# Altium PCB pwr_pcb.PcbDoc
Units mm, origin at the board's own origin, x right, y up, seen from the top; angles counter-clockwise.
Board outline 75 x 100 mm, 4 copper layers (Top Layer, Int1 (GND), Int2 (PWR), Bottom Layer), stack 1.203 mm thick; 49 components, 55 nets, 175 pads, 0 vias.
Unrouted connection lines stored in the file: 117.
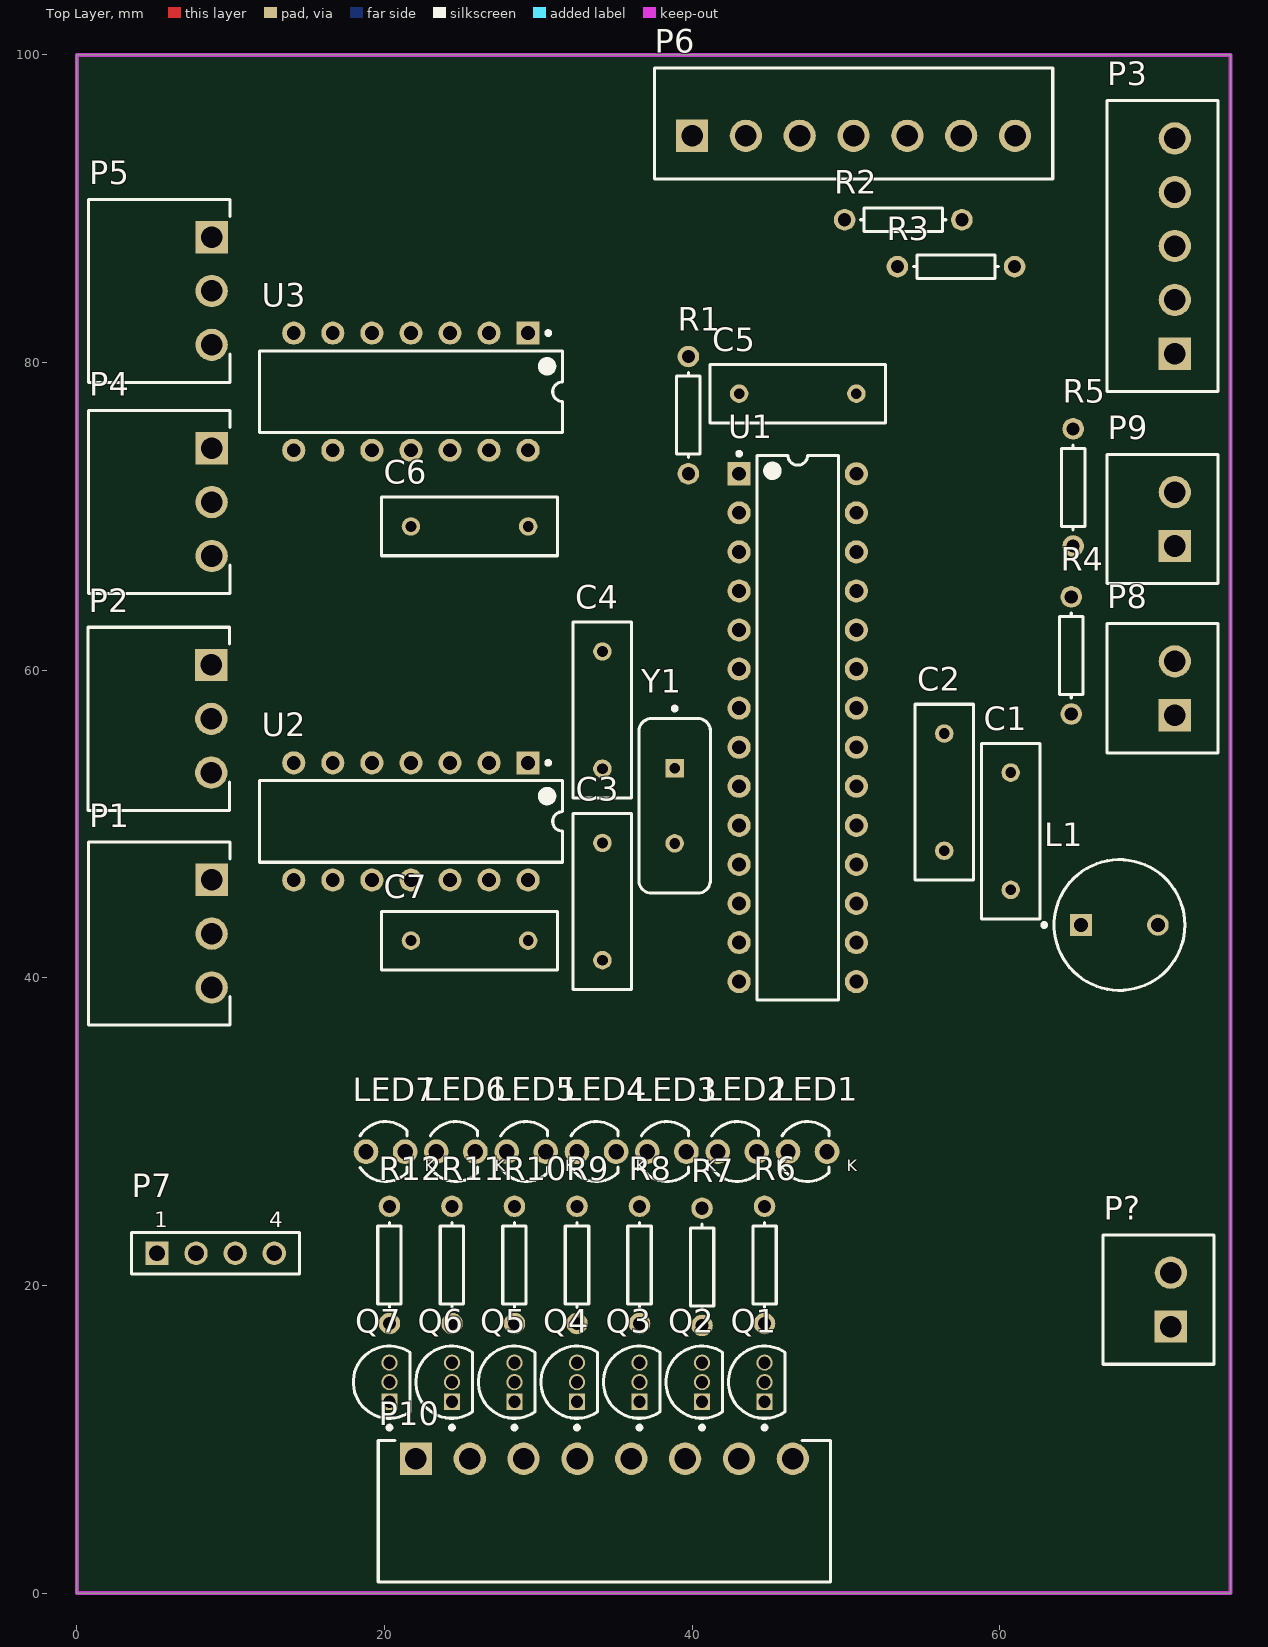
[diagram p0: Top Layer view]
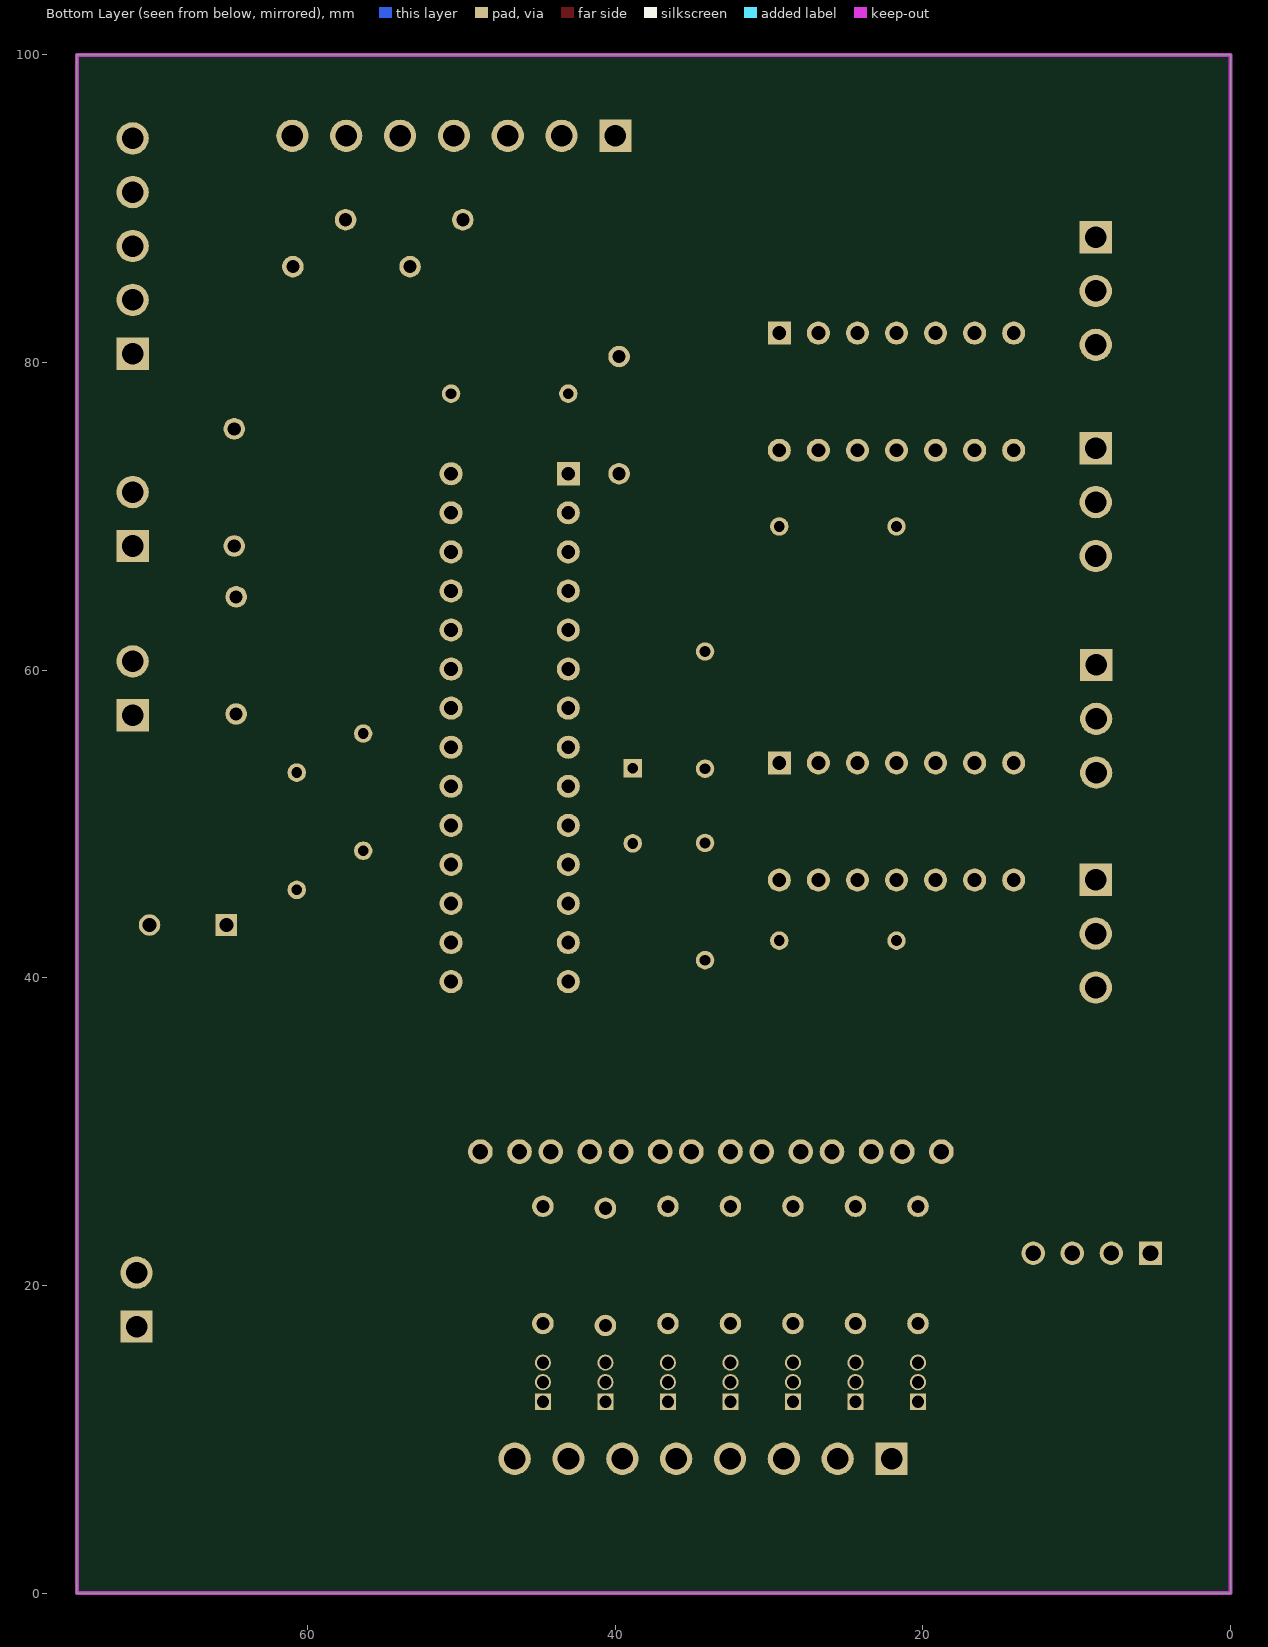
[diagram p1: Bottom Layer view, seen from below]
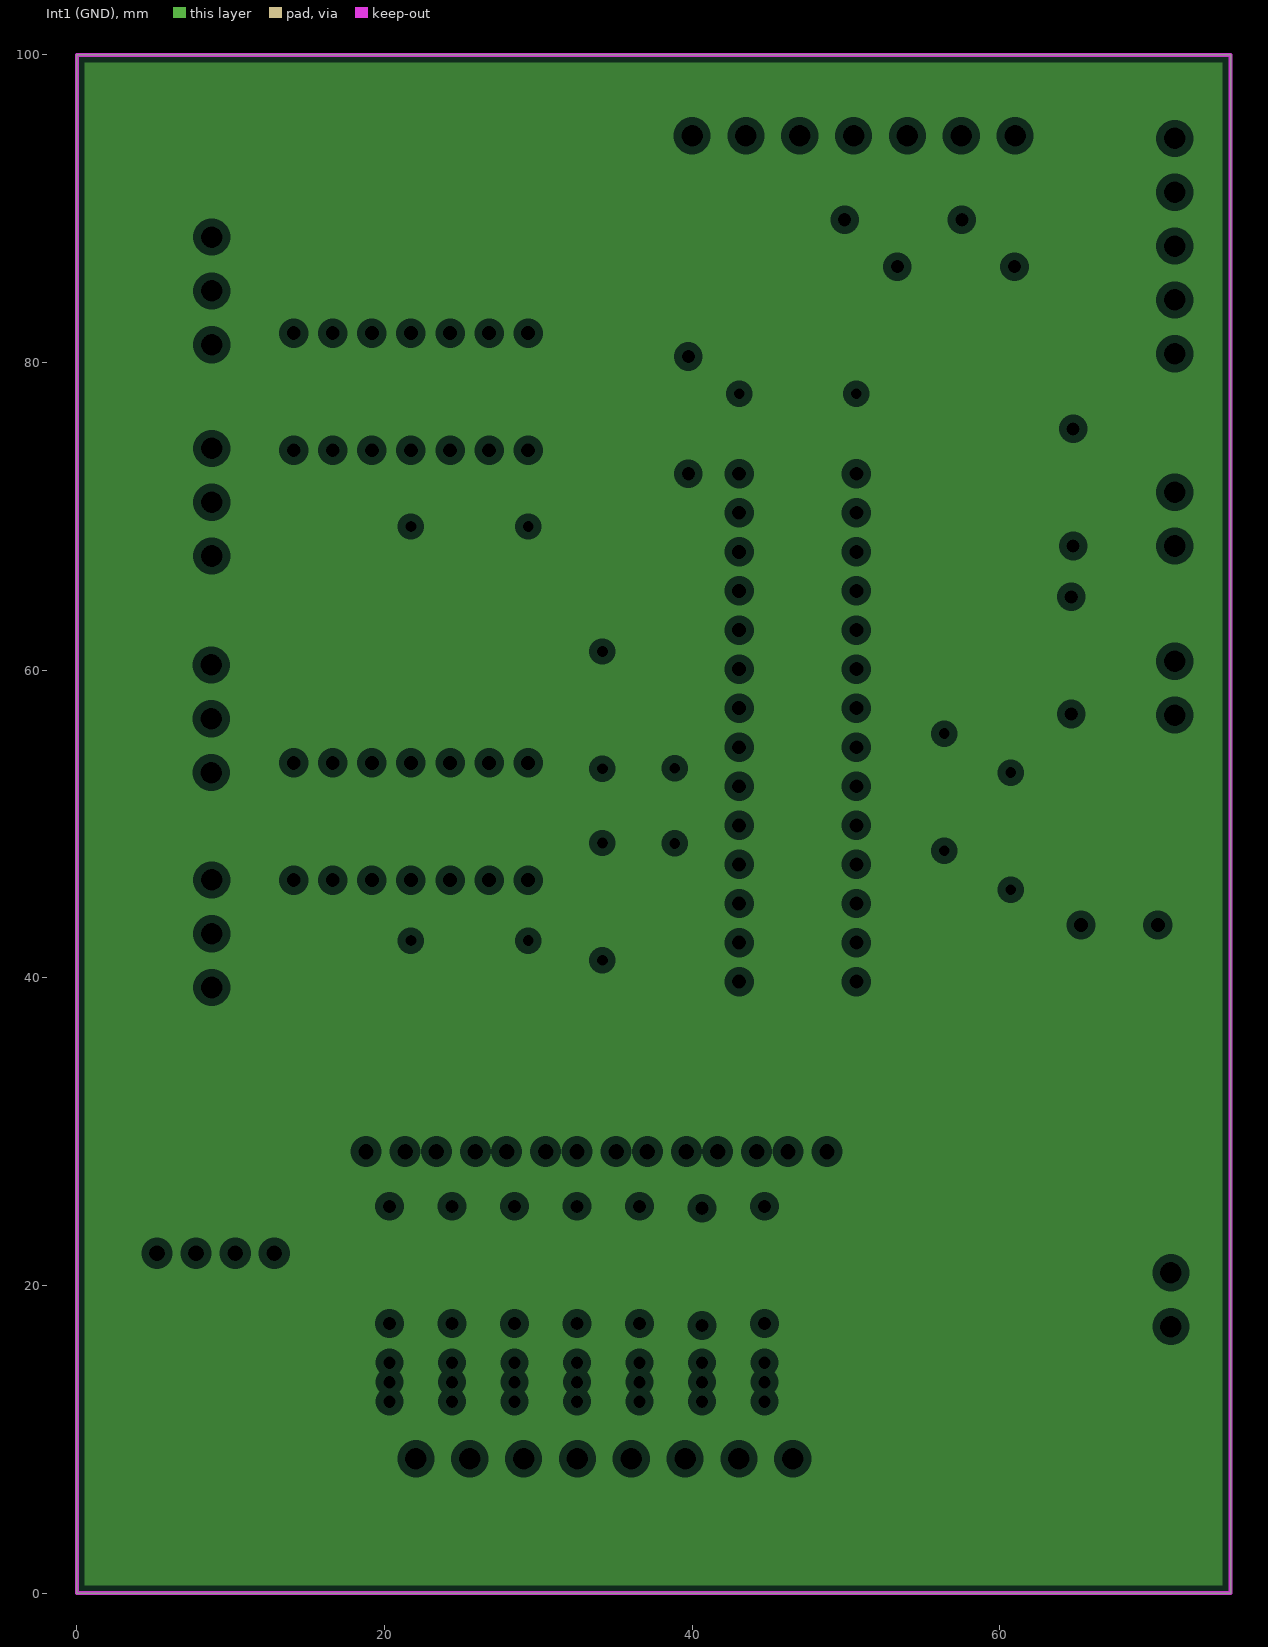
[diagram p2: Int1 (GND), clearances drawn from the general rule]
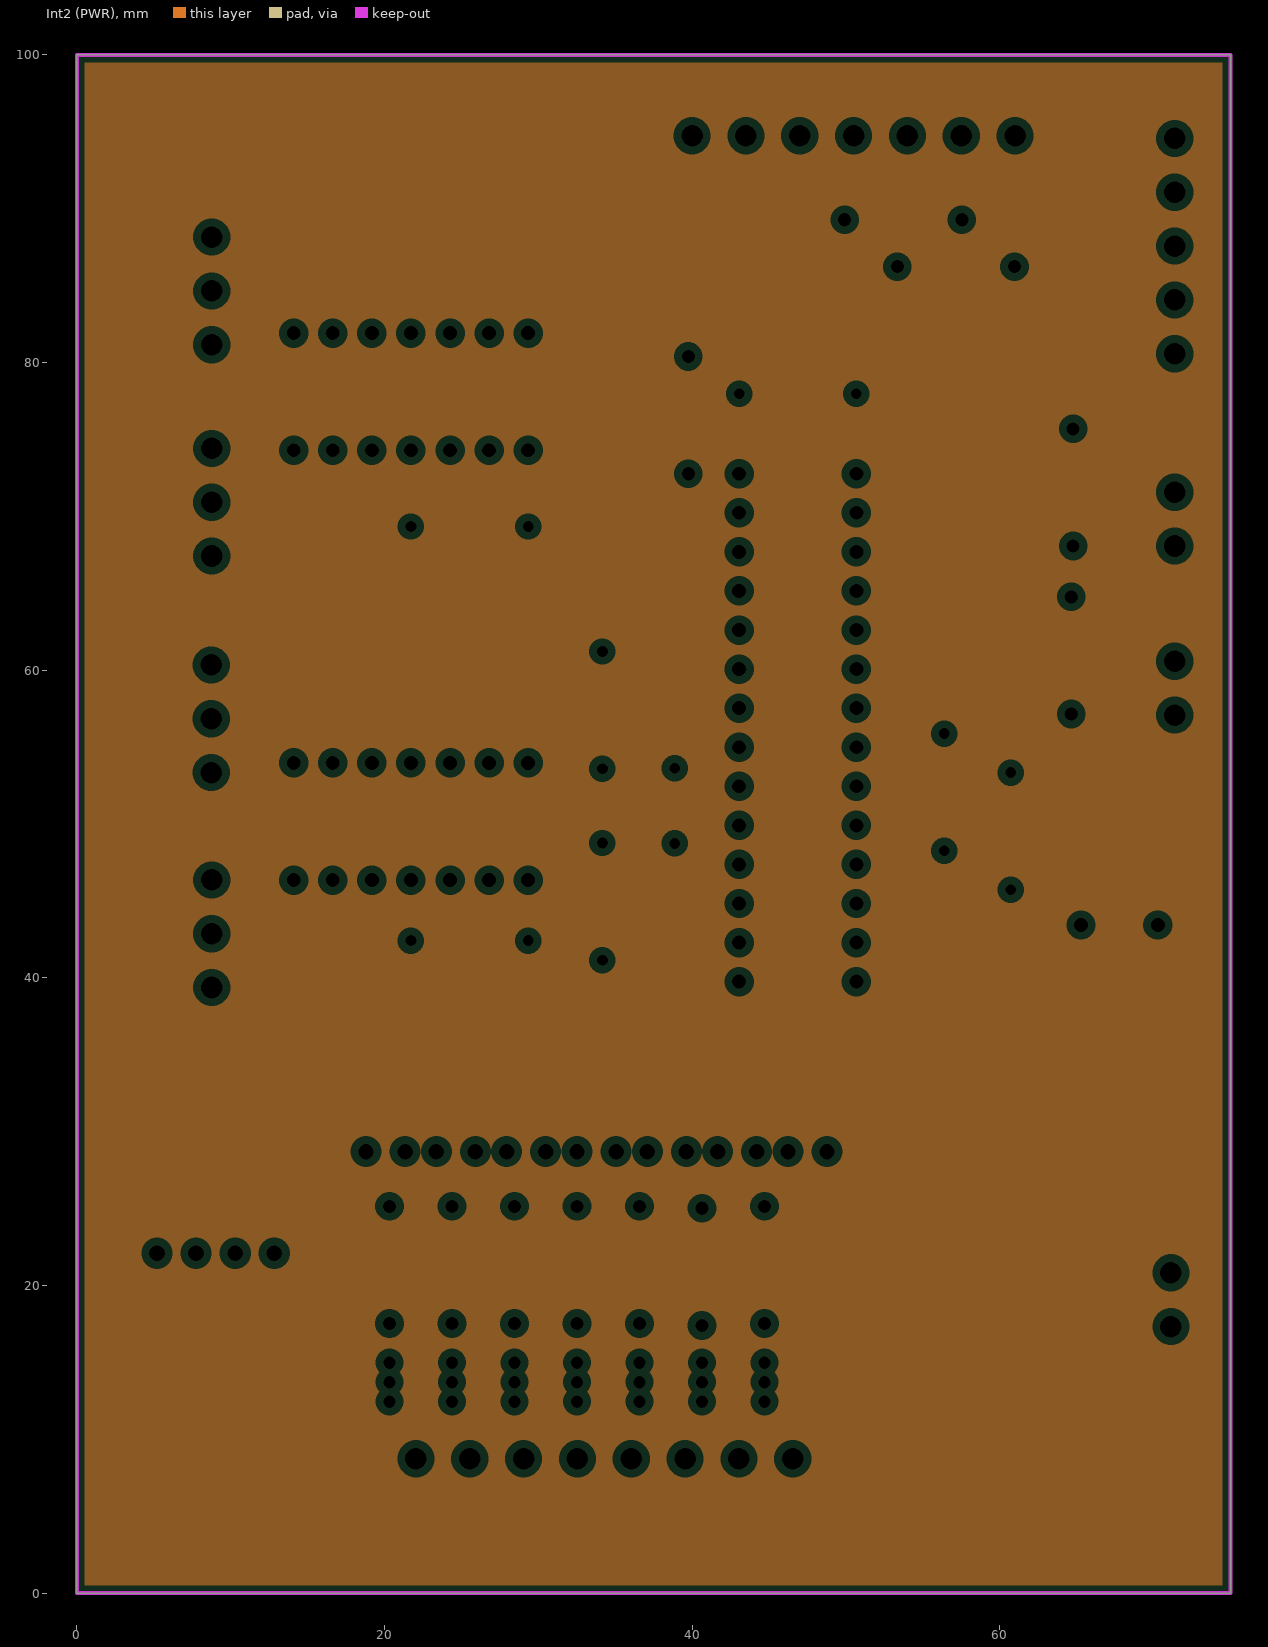
[diagram p3: Int2 (PWR), clearances drawn from the general rule]

## Layer stack, top to bottom
Top Solder: solder mask 0.0254, SM-001, Dk 4
Top Layer: signal copper 0.018
Dielectric 1: prepreg 0.0965, PP-012, Dk 4
Dielectric 2: prepreg 0.0965, PP-012, Dk 4
Int1 (GND): plane copper 0.035
Dielectric 3: core 0.7112, Core-039, Dk 4.8
Int2 (PWR): plane copper 0.035
Dielectric 4: prepreg 0.0965, PP-012, Dk 4
Dielectric 5: prepreg 0.0965, PP-012, Dk 4
Bottom Layer: signal copper 0.018
Bottom Solder: solder mask 0.0254, SM-001, Dk 4

## Board outline
0,0 75,0 75,100 0,100

## Design rules (kind name [scope] priority, off if disabled: settings)
Clearance [All] p1: gap=0.254 ignorepadtopadclearanceinfootprint=FALSE except(0: Arc-Hole Track-Hole SMDPad-Hole THPad-Hole Via-Hole Fill-Hole Poly-Hole Region-Hole Text-Hole)
PlaneClearance [All] p1: clearance=0.508
PlaneConnect [All] p1: planeconnectstyle=Relief reliefexpansion=0.508 reliefentries=4 reliefconductorwidth=0.254 reliefairgap=0.254
PolygonConnect [All] p1: connectstyle=Relief reliefconductorwidth=0.254 reliefentries=4 polygonreliefangle="90 Angle" airgapwidth=0.254
RoutingVias [All] p1: holewidth=0.711 width=1.27 viastyle="Through Hole" minholewidth=0.711 minwidth=1.27 maxholewidth=0.711 maxwidth=1.27
SolderMaskExpansion [All] p1: expansion=0.102 istentingtop=FALSE
Width [All] p1: maxlimit=0.254 minlimit=0.254 preferedwidth=0.254
28 further rules are at their usual default settings.

## Classes and differential pairs
component class U_uC_pwr: C1 C2 C3 C4 C5 L1 R1 U1 Y1
component class U_relay_driver: LED1 LED2 LED3 LED4 LED5 LED6 LED7 P10 Q1 Q2 Q3 Q4 Q5 Q6 Q7 R6 R7 R8 R9 R10 R11 R12
component class U_pwr_IO: C6 C7 P1 P2 P3 P4 P5 P6 P7 P8 P9 P? R2 R3 R4 R5 U2 U3

## Components (designator, comment, footprint, x,y, rotation, side; value= is the part's Value field where it differs from the comment)
C1 "Cap" RAD-0.3 60.706,49.53 r270 top value=100nF
C2 "Cap" RAD-0.3 56.388,52.07 r270 top value=100nF
C3 "Cap" RAD-0.3 34.163,44.958 r90 top value=22pF
C4 "Cap" RAD-0.3 34.163,57.404 r270 top value=22pF
C5 "Cap" RAD-0.3 46.863,77.978 r180 top value=1uF
C6 "Cap" RAD-0.3 25.527,69.342 r0 top value=100nF
C7 "Cap" RAD-0.3 25.527,42.418 r0 top value=100nF
L1 "10mH" INDR62-500-1100X850X1100 67.778,43.434 r0 top
LED1 "151033RS03000" "Type 3mm" 47.498,28.702 r0 top
LED2 "151033RS03000" "Type 3mm" 42.926,28.702 r0 top
LED3 "151033RS03000" "Type 3mm" 38.354,28.702 r0 top
LED4 "151033RS03000" "Type 3mm" 33.782,28.702 r0 top
LED5 "151033RS03000" "Type 3mm" 29.21,28.702 r0 top
LED6 "151033RS03000" "Type 3mm" 24.638,28.702 r0 top
LED7 "151033RS03000" "Type 3mm" 20.066,28.702 r0 top
P1 "691322110003" 691322110003 5.363,42.87 r270 top
P2 "691322110003" 691322110003 5.334,56.84 r270 top
P3 "691321100005" 691321100005 70.574,87.574 r90 top
P4 "691322110003" 691322110003 5.363,70.922 r270 top
P5 "691322110003" 691322110003 5.363,84.653 r270 top
P6 "691321100007" 691321100007 50.49,95.542 r0 top
P7 "61300411821" 61300411821 9.017,22.098 r0 top
P8 "691321100002" 691321100002 70.574,58.829 r90 top
P9 "691321100002" 691321100002 70.574,69.822 r90 top
P10 "691322110008" 691322110008 34.29,5.334 r0 top
P? "691321100002" 691321100002 70.32,19.078 r90 top
Q1 "P2N2222AG" ONSC-TO-92-3-29-11 44.704,13.715 r90 top
Q2 "P2N2222AG" ONSC-TO-92-3-29-11 40.64,13.715 r90 top
Q3 "P2N2222AG" ONSC-TO-92-3-29-11 36.576,13.715 r90 top
Q4 "P2N2222AG" ONSC-TO-92-3-29-11 32.512,13.715 r90 top
Q5 "P2N2222AG" ONSC-TO-92-3-29-11 28.448,13.715 r90 top
Q6 "P2N2222AG" ONSC-TO-92-3-29-11 24.384,13.715 r90 top
Q7 "P2N2222AG" ONSC-TO-92-3-29-11 20.32,13.715 r90 top
R1 "Res1" AXIAL-0.3 39.751,76.581 r90 top value=10K
R2 "Res1" AXIAL-0.3 53.721,89.281 r0 top value=10k
R3 "Res1" AXIAL-0.3 57.15,86.233 r0 top value=10k
R4 "Res1" AXIAL-0.3 64.643,60.96 r270 top value=10k
R5 "Res1" AXIAL-0.3 64.77,71.882 r270 top value=10k
R6 "Res3" AXIAL-0.3 44.704,21.336 r270 top value=330
R7 "Res3" AXIAL-0.3 40.64,21.209 r270 top value=330
R8 "Res3" AXIAL-0.3 36.576,21.336 r270 top value=330
R9 "Res3" AXIAL-0.3 32.512,21.336 r270 top value=330
R10 "Res3" AXIAL-0.3 28.448,21.336 r270 top value=330
R11 "Res3" AXIAL-0.3 24.384,21.336 r270 top value=330
R12 "Res3" AXIAL-0.3 20.32,21.336 r270 top value=330
U1 "ATmega328-PU" 28P3 46.863,56.261 r0 top
U2 "MCP42100-E/P" PDIP300-P14 21.717,50.165 r270 top
U3 "MCP42100-E/P" PDIP300-P14 21.717,78.105 r270 top
Y1 "FOXSLF/160-20" FOX-FOXSLF160-20 38.862,51.181 r270 top

## Footprints (in the part's own frame and the unit in brackets; to place one, negate y for a bottom-side part, rotate by r counter-clockwise, add the part's x,y. Pads: shape width x height; smd on the part's side, far side on the other; paste and mask are expansions set on the pad)
28P3 [mm] "28-Pin Plastic Dual In-Line Package (PDIP)"
  rect 1.5x1.5 hole 0.9: 1(-3.81,16.51)
  round 1.5 hole 0.9: 2(-3.81,13.97) 3(-3.81,11.43) 4(-3.81,8.89) 5(-3.81,6.35) 6(-3.81,3.81) 7(-3.81,1.27) 8(-3.81,-1.27) 9(-3.81,-3.81) 10(-3.81,-6.35) 11(-3.81,-8.89) 12(-3.81,-11.43) 13(-3.81,-13.97) 14(-3.81,-16.51) 15(3.81,-16.51) 16(3.81,-13.97) 17(3.81,-11.43) 18(3.81,-8.89) 19(3.81,-6.35) 20(3.81,-3.81) 21(3.81,-1.27) 22(3.81,1.27) 23(3.81,3.81) 24(3.81,6.35) 25(3.81,8.89) 26(3.81,11.43) 27(3.81,13.97) 28(3.81,16.51)
  silkscreen extent -3.93,-17.7 2.65,17.93, body extent -3.6,-17.65 3.6,17.65, height 4.58
61300411821 [mm] "Socket Header, Pitch 2.54 mm, THT, Vertical, single row, 4p"
  rect 1.52x1.52 hole 1.02: 1(-3.81,0)
  round 1.52 hole 1.02: 2(-1.27,0) 3(1.27,0) 4(3.81,0)
  silkscreen extent -5.46,-1.35 5.46,1.35, body extent -5.33,-1.25 5.33,1.25, height 8.55
691321100002 [mm] "Vertical PCB Header, pitch 3.5mm, 02p"
  rect 2.1x2.1 hole 1.4: 1(-1.75,-0.8)
  round 2.1 hole 1.4: 2(1.75,-0.8)
  silkscreen extent -4.2,-3.6 4.2,3.6, body extent -4.2,-3.6 4.2,3.6, height 9.3
691321100005 [mm] "Vertical PCB Header, pitch 3.5mm, 05p"
  rect 2.1x2.1 hole 1.4: 1(-7,-0.8)
  round 2.1 hole 1.4: 2(-3.5,-0.8) 3(0,-0.8) 4(3.5,-0.8) 5(7,-0.8)
  silkscreen extent -9.45,-3.6 9.45,3.6, body extent -9.45,-3.6 9.45,3.6, height 9.3
691321100007 [mm] "Vertical PCB Header, pitch 3.5mm, 07p"
  rect 2.1x2.1 hole 1.4: 1(-10.5,-0.8)
  round 2.1 hole 1.4: 2(-7,-0.8) 3(-3.5,-0.8) 4(0,-0.8) 5(3.5,-0.8) 6(7,-0.8) 7(10.5,-0.8)
  silkscreen extent -12.95,-3.6 12.95,3.6, body extent -12.95,-3.6 12.95,3.6, height 9.3
691322110003 [mm] "Horizontal PCB Header, pitch 3.5mm, 03p"
  rect 2.1x2.1 hole 1.4: 1(-3.5,3.4)
  round 2.1 hole 1.4: 2(0,3.4) 3(3.5,3.4)
  silkscreen extent -5.95,-4.6 5.95,4.6, body extent -5.95,-4.6 5.95,4.6, height 7.3
691322110008 [mm] "Horizontal PCB Header, pitch 3.5mm, 08p"
  rect 2.1x2.1 hole 1.4: 1(-12.25,3.4)
  round 2.1 hole 1.4: 2(-8.75,3.4) 3(-5.25,3.4) 4(-1.75,3.4) 5(1.75,3.4) 6(5.25,3.4) 7(8.75,3.4) 8(12.25,3.4)
  silkscreen extent -14.7,-4.6 14.7,4.6, body extent -14.7,-4.6 14.7,4.6, height 7.3
AXIAL-0.3 [mm] "Axial Device, Thru-Hole; 2 Leads; 0.3 in Pin Spacing"
  round 1.4 hole 0.85: 1(-3.81,0) 2(3.81,0)
  silkscreen extent -2.77,-0.76 2.77,0.76
FOX-FOXSLF160-20 [mm] "THD, 2-Leads, Body 11.35x4.65mm"
  rect 1.2x1.2 hole 0.7: 1(-2.44,0)
  round 1.2 hole 0.7: 2(2.44,0)
  silkscreen extent -6.45,-2.32 5.68,2.32, body extent -5.67,-2.32 5.68,2.33, height 3.6
INDR62-500-1100X850X1100 [mm] "THD, 2-Leads, Dia 8.5mm, Pitch 5mm"
  rect 1.4x1.4 hole 0.9 unplated: 1(-2.5,0)
  round 1.4 hole 0.9 unplated: 2(2.5,0)
  silkscreen extent -5.02,-4.25 4.25,4.25, body extent -4.25,-4.25 4.25,4.25, height 11
ONSC-TO-92-3-29-11 [mm] "TO, 3-Leads, Body Dia 4.7mm, Pitch 1.27mm"
  rect 1.05x1.05 hole 0.8: 1(-1.27,0)
  round 1.05 hole 0.8: 2(0,0) 3(1.27,0)
  silkscreen extent -3.07,-1.34 2.35,2.35, body extent -2.35,-1.33 2.36,2.36, height 7.87
PDIP300-P14 [mm] "DIP, 14-Pin, Row Spacing 7.62 mm, Pitch 2.54 mm"
  rect 1.5x1.5 hole 0.9: 1(-3.81,7.62)
  round 1.5 hole 0.9: 2(-3.81,5.08) 3(-3.81,2.54) 4(-3.81,0) 5(-3.81,-2.54) 6(-3.81,-5.08) 7(-3.81,-7.62) 8(3.81,-7.62) 9(3.81,-5.08) 10(3.81,-2.54) 11(3.81,0) 12(3.81,2.54) 13(3.81,5.08) 14(3.81,7.62)
  silkscreen extent -3.93,-9.85 2.65,9.85, body extent -3.55,-9.85 3.55,9.85, height 5.33
RAD-0.3 [mm] "Radial Cap, Thru-Hole; 2 Leads; 0.3 in Pin Spacing"
  round 1.2 hole 0.7: 1(-3.81,0) 2(3.81,0)
  silkscreen extent -5.71,-1.91 5.71,1.91
"Type 3mm" [mm] "THT, LED-3mm, 2pin- Body 4.15mm(max)"
  round 1.6 hole 1: 1(1.27,0) 2(-1.27,0)
  silkscreen extent -1.66,-1.95 1.4,1.95, body extent -1.93,-1.94 1.87,1.94, height 10.5

## Part data
C1 C2 C3 C4 C5 C6 C7: "Capacitor", LatestRevisionDate=17-Jul-2002, LatestRevisionNote="Re-released for DXP Platform.", PackageDescription="Radial Cap, Thru-Hole; 2 Leads; 0.3 in Pin Spacing", PackageReference=RAD-0.3, Published=8-Jun-2000, Publisher="Altium Limited"
L1: library part CMP-1747-00016-1, "Radial Inductor, 10 uH, +/- 10%, 3 A, -55 to 105 degC, 2-Pin THD, RoHS, Bulk", Case\Package=DIP, Max Operating Temperature="70 degC", Max Supply Voltage="36 V", Min Operating Temperature="0 degC", Min Supply Voltage="4.5 V", Output Current="600 mA", Package Quantity=25, ComponentLink1Description="Manufacturer URL", ComponentLink1URL=http://www.bourns.com/, ComponentLink2Description=Datasheet, ComponentLink2URL=http://www.bourns.com/docs/Product-Datasheets/rl622_series.pdf, DatasheetVersion=Aug-10, Height="0.25 inch", Interface=Parallel, Length="0.75 inch", Mount="Through Hole", Output Voltage="36 V", Outputs=4, PackageDescription="2-Pin Radial Lead, Dia 8.5 mm, Pitch 5 mm", PackageReference=INDR62-500-1100X850X1100, Packaging=Rail/Tube, Pins=16, Radiation Hardening=No, REACH SVHC="No SVHC", RoHSCompliant=true, Weight="0.03357 oz", Width="0.25 inch"
LED1 LED2 LED3 LED4 LED5 LED6 LED7: library part CMP-1489-00004-1, "THT LED round mono-color waterclear, WL-TMRW, Red", Emitting color=Red, Manufacturer="Wuerth Elektronik", ComponentLink1Description="Manufacturer URL", ComponentLink1URL=http://www.we-online.com, ComponentLink2Description=Datasheet, ComponentLink2URL=http://katalog.we-online.de/pbs/datasheet/7448042001.pdfhttp://katalog.we-online.de/pbs/datasheet/7448042001.pdfhttp://katalog.we-online.de/pbs/datasheet/7448042001.pdfhttp://katalog.we-online.de/pbs/datasheet/151033RS03000.pdf, PackageReference="Type 3mm", PartNumber=151033RS03000
P1 P2 P4 P5: library part CMP-1502-01792-1, "Serie 3221 - 3.50mm Horizontal PCB Header WR-TBL, 3 pin", Manufacturer="Wurth Elektronik", Operating Temperature=-40to105degC, Datasheet URL=http://katalog.we-online.de/em/datasheet/6913221100xx.pdf, Gender=Male, Manufacturer URL=http://www.we-online.de, Mounting Technology=THT, Package Reference=691322110003, Packaging=Box, Part Number=691322110003, Pin Number=3, Pitch=3.50mm, Publisher=WurthElektronik
P3: library part CMP-1502-01786-1, "Serie 3211 - 3.50mm Vertical PCB Header WR-TBL, 5 pin", Manufacturer="Wurth Elektronik", Operating Temperature=-40to105degC, Datasheet URL=http://katalog.we-online.de/em/datasheet/6913211000xx.pdf, Gender=Male, Manufacturer URL=http://www.we-online.de, Mounting Technology=THT, Package Reference=691321100005, Packaging=Box, Part Number=691321100005, Pin Number=5, Pitch=3.50mm, Publisher=WurthElektronik
P6: library part CMP-1502-01788-1, "Serie 3211 - 3.50mm Vertical PCB Header WR-TBL, 7 pin", Manufacturer="Wurth Elektronik", Operating Temperature=-40to105degC, Datasheet URL=http://katalog.we-online.de/em/datasheet/6913211000xx.pdf, Gender=Male, Manufacturer URL=http://www.we-online.de, Mounting Technology=THT, Package Reference=691321100007, Packaging=Box, Part Number=691321100007, Pin Number=7, Pitch=3.50mm, Publisher=WurthElektronik
P7: library part CMP-1502-01316-1, "THT Vertical Socket Header WR-PHD, Pitch 2.54 mm, Single Row, 4 pins", Contact Resistance=20mOhm, Manufacturer="Wurth Elektronik", Operating Temperature=-40to125degC, Rated Current=3A, Withstanding Voltage=500VAC, Working Voltage=250VAC, Datasheet URL=https://katalog.we-online.de/em/datasheet/6130xx11821.pdf, Gender=Female, Manufacturer URL=http://www.we-online.de, Mounting Technology=THT, Orientation=Vertical, Package Reference=61300411821, Packaging=Tray, Part Number=61300411821, Pin Number=4, Pitch=2.54mm, Publisher=WurthElektronik, Row Number=Single
P8 P9 P?: library part CMP-1502-01783-1, "Serie 3211 - 3.50mm Vertical PCB Header WR-TBL, 2 pin", Manufacturer="Wurth Elektronik", Operating Temperature=-40to105degC, Datasheet URL=http://katalog.we-online.de/em/datasheet/6913211000xx.pdf, Gender=Male, Manufacturer URL=http://www.we-online.de, Mounting Technology=THT, Package Reference=691321100002, Packaging=Box, Part Number=691321100002, Pin Number=2, Pitch=3.50mm, Publisher=WurthElektronik
P10: library part CMP-1502-01797-1, "Serie 3221 - 3.50mm Horizontal PCB Header WR-TBL, 8 pin", Manufacturer="Wurth Elektronik", Operating Temperature=-40to105degC, Datasheet URL=http://katalog.we-online.de/em/datasheet/6913221100xx.pdf, Gender=Male, Manufacturer URL=http://www.we-online.de, Mounting Technology=THT, Package Reference=691322110008, Packaging=Box, Part Number=691322110008, Pin Number=8, Pitch=3.50mm, Publisher=WurthElektronik
Q1 Q2 Q3 Q4 Q5 Q6 Q7: library part CMP-1048-01402-1, "Amplifier Transistor, NPN Silicon, 3-Pin TO-92, Pb-Free, Bulk Box", Manufacturer="On Semiconductor", ComponentLink1Description="Manufacturer URL", ComponentLink1URL=http://www.onsemi.com/, ComponentLink2Description=Datasheet, ComponentLink2URL=http://www.onsemi.com/pub_link/Collateral/P2N2222A-D.PDF, ComponentLink3Description="Package Specification", ComponentLink3URL=http://www.onsemi.cn/pub_link/Collateral/2N6426-D.PDF, DatasheetVersion="Rev. 7", fT Min (MHz)=300, IC Continuous (A)=0.6, Mounting Technology="Through Hole", PackageDescription="3-Pin Transistor Outline, Body 4.825 x 3.685 mm, Pitch 1.27 mm", PackageReference=TO-92-3-29-11_AM_SL, PackageVersion="Rev. AM", Packing="Bulk Box", PartNumber=P2N2222AG, Polarity=NPN, RoHS=TRUE
R1 R2 R3 R4 R5 R6 R7 R8 R9 R10 R11 R12: "Resistor", Published=8-Jun-2000, Publisher="Altium Limited"
  R1 R2 R3 R4 R5: LatestRevisionDate=17-Jul-2002, LatestRevisionNote="Re-released for DXP Platform.", PackageDescription="Axial Device, Thru-Hole; 2 Leads; 0.3 in Pin Spacing", PackageReference=AXIAL-0.3
  R6 R7 R8 R9 R10 R11 R12: LatestRevisionDate=29-May-2009, LatestRevisionNote="IPC-7351 Footprint Added.", PackageDescription="Chip Resistor", PackageReference=J1-0603
U1: library part CMP-0095-00015-2, "8-bit AVR Microcontroller, 32KB Flash, 1KB EEPROM, 2KB SRAM, 28-pin PDIP, Industrial Grade (-40°C to 85°C)", ComponentLink1Description="Manufacturer URL", ComponentLink1URL=http://www.atmel.com/, ComponentLink2Description="ATmega48A/48PA/88A/88PA/168A/168PA/328/328P Datasheet", ComponentLink2URL=http://www.atmel.com/dyn/resources/prod_documents/8271.pdf, ComponentLink3Description="ATmega48A/48PA/88A/88PA/168A/168PA/328/328P Summary", ComponentLink3URL=http://www.atmel.com/dyn/resources/prod_documents/8271S.pdf, DatasheetVersion="revD, May-2011", PackageDescription="28-lead (0.300\"/7.62mm Wide) Plastic Dual Inline Package (PDIP)", PackageReference=28P3, PackageVersion="revB, Sep-2001", RevisionNote="DatasheetVersion updated. URLs added."
U2 U3: library part CMP-0188-00236-2, "Single/Dual Digital Potentiometer with SPI Interface, 14-Pin PDIP, Extended Temperature", ComponentLink1Description="Manufacturer URL", ComponentLink1URL=http://www.microchip.com/, ComponentLink2Description=Datasheet, ComponentLink2URL=http://ww1.microchip.com/downloads/en/DeviceDoc/11195c.pdf, ComponentLink3Description="Package Specification", ComponentLink3URL=http://www.microchip.com/stellent/groups/techpub_sg/documents/packagingspec/en012702.pdf, DatasheetVersion=Jul-2003, PackageDescription="14-Lead Plastic Dual In-Line (P) - 300 mil Body [PDIP]", PackageReference=PDIP300-P14, PackageVersion="revBB, Aug-2009", RevisionNote="URLs added."
Y1: library part CMP-1749-00003-1, "Resistance Weld Thru-Hole Crystal, 16 MHz, -20 to 70 degC, 2-Pin THD, RoHS, Bulk", Case\Package=Axial, Max Operating Temperature="155 degC", Min Operating Temperature="-55 degC", Package Quantity=200, Power Rating="250 mW", Resistance="221 kohm", Tolerance=1%, Voltage Rating="250 V", ComponentLink1Description="Manufacturer URL", ComponentLink1URL=http://www.foxonline.com/, ComponentLink2Description=Datasheet, ComponentLink2URL=http://www.foxonline.com/pdfs/hc49slf.pdf, DatasheetVersion=Mar-15, Length="0.248 inch", Mount="Through Hole", PackageDescription="2-Pin Through Hole Device, Body 11.35 x 4.65 mm", PackageReference=FOXSLF160-20, Packaging=Bulk, RoHSCompliant=true

## Nets (pads, with @x,y where several pads share a name; then routed paths per layer and width w, separated by ;. In a path a pad name is that pad's centre, name@x,y a point inside that pad or via, vN(x,y) a via of type N, cw(c..) or ccw(c..) an arc to the next point about the centre after c; other vN are vias at no path point)
+5: C6.2 C7.2 L1.2 P3.2 P7.2 P8.2 P9.2 P10.8 P?.1 R1.2 U1.7 U2.11 U2.12 U2.14 U3.11 U3.12 U3.14
CS: P6.5 U2.1 U3.1
GND: C1.1 C2.1 C3.1 C4.1 C5.1 C6.1 C7.1 LED1.1 LED2.1 LED3.1 LED4.1 LED5.1 LED6.1 LED7.1 P3.1 P7.1 P?.2 Q1.3 Q2.3 Q3.3 Q4.3 Q5.3 Q6.3 Q7.3 R2.1 R3.1 R4.1 R5.1 U1.8 U1.22 U2.4 U3.4
MOSI: P6.3 U2.3
NetC1_2: C1.2 L1.1 U1.20
NetC2_2: C2.2 U1.21
NetLED1_2: LED1.2 R6.1
NetLED2_2: LED2.2 R7.1
NetLED3_2: LED3.2 R8.1
NetLED4_2: LED4.2 R9.1
NetLED5_2: LED5.2 R10.1
NetLED6_2: LED6.2 R11.1
NetLED7_2: LED7.2 R12.1
NetP3_3: P3.3 U1.5
NetP3_4: P3.4 U1.4
NetP3_5: P3.5 U1.2
NetP6_1: P6.1 U1.6
NetP6_2: P6.2 U1.3
NetP7_3: P7.3 U1.27
NetP7_4: P7.4 U1.28
NetP8_1: P8.1 R4.2 U1.23
NetP9_1: P9.1 R5.2 U1.24
NetQ1_2: Q1.2 R6.2 U1.11
NetQ2_2: Q2.2 R7.2 U1.12
NetQ3_2: Q3.2 R8.2 U1.13
NetQ4_2: Q4.2 R9.2 U1.14
NetQ5_2: Q5.2 R10.2 U1.15
NetQ6_2: Q6.2 R11.2 U1.16
NetQ7_2: Q7.2 R12.2 U1.17
PA0: P1.1 U2.8
PA1: P2.1 U2.7
PA2: P4.1 U3.8
PA3: P5.1 U3.7
PB0: P1.3 U2.10
PB1: P2.3 U2.5
PB2: P4.3 U3.10
PB3: P5.3 U3.5
PW0: P1.2 U2.9
PW1: P2.2 U2.6
PW2: P4.2 U3.9
PW3: P5.2 U3.6
RES: C5.2 R1.1 U1.1
SCK: P6.4 U2.2 U3.2
SO: U2.13 U3.3
SW1: P10.7 Q1.1
SW2: P10.6 Q2.1
SW3: P10.5 Q3.1
SW4: P10.4 Q4.1
SW5: P10.3 Q5.1
SW6: P10.2 Q6.1
SW7: P10.1 Q7.1
T_pan: P6.7 R3.2 U1.26
T_ui: P6.6 R2.2 U1.25
XTAL1: C4.2 U1.9 Y1.1
XTAL2: C3.2 U1.10 Y1.2
pads on no net: U1.18 U1.19 U3.13

## Polygon pours and split planes (outlines as drawn)
no net on Int1 (GND) (split plane): 74.49,0.51 0.51,0.51 0.51,99.49 74.49,99.49
no net on Int2 (PWR) (split plane): 74.49,0.51 0.51,0.51 0.51,99.49 74.49,99.49

## Keep-outs
Keep-Out Layer:
  the board outline again, w0.254

## Text inside footprints (layer, text, board x,y; h text height)
LED1: Top Overlay "K" at 50.038,27.432 h0.76; Mechanical 15 "K" at 50.038,27.432 h0.76
LED2: Top Overlay "K" at 45.466,27.432 h0.76; Mechanical 15 "K" at 45.466,27.432 h0.76
LED3: Top Overlay "K" at 40.894,27.432 h0.76; Mechanical 15 "K" at 40.894,27.432 h0.76
LED4: Top Overlay "K" at 36.322,27.432 h0.76; Mechanical 15 "K" at 36.322,27.432 h0.76
LED5: Top Overlay "K" at 31.75,27.432 h0.76; Mechanical 15 "K" at 31.75,27.432 h0.76
LED6: Top Overlay "K" at 27.178,27.432 h0.76; Mechanical 15 "K" at 27.178,27.432 h0.76
LED7: Top Overlay "K" at 22.606,27.432 h0.76; Mechanical 15 "K" at 22.606,27.432 h0.76
P7: Top Overlay "1" at 5.017,23.798 h1.02; Top Overlay "4" at 12.517,23.798 h1.02